# Altium PCB voltage regulator.PcbDoc
Units mm, origin at the board's own origin, x right, y up, seen from the top; angles counter-clockwise.
Board outline 26 x 9 mm, 2 copper layers (Top Layer, Bottom Layer); 5 components, 3 nets, 17 pads, 5 vias.
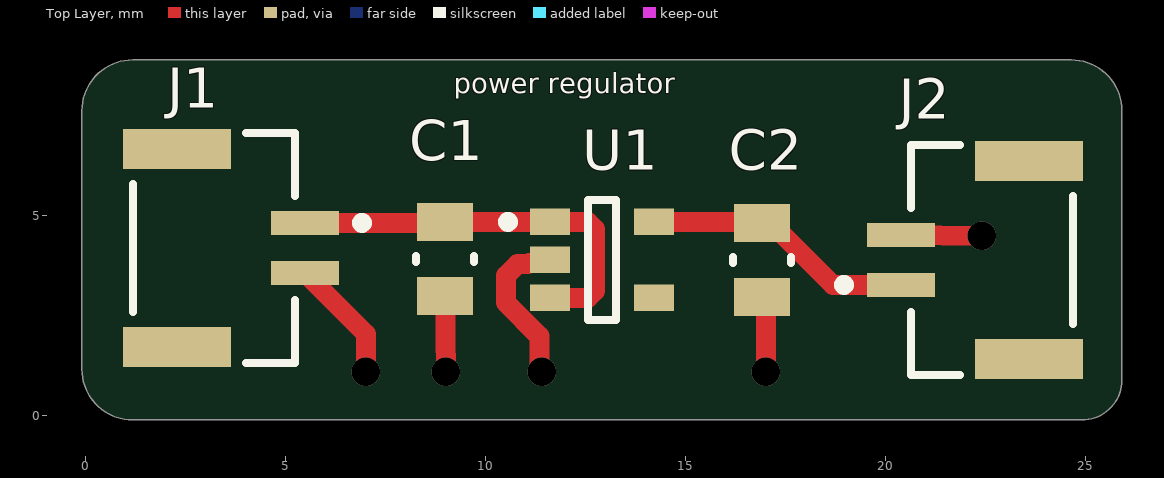
[diagram p0: Top Layer view]
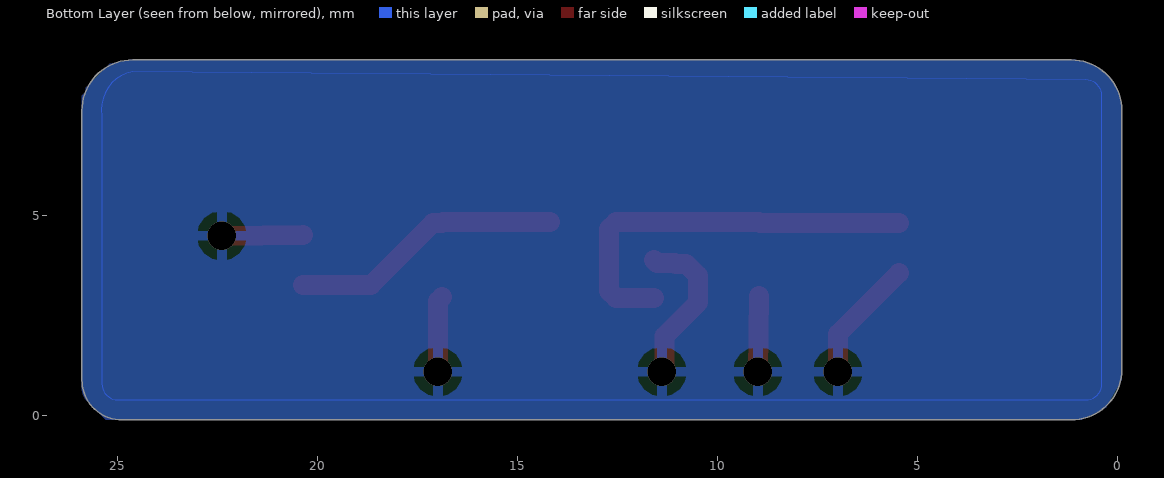
[diagram p1: Bottom Layer view, seen from below]
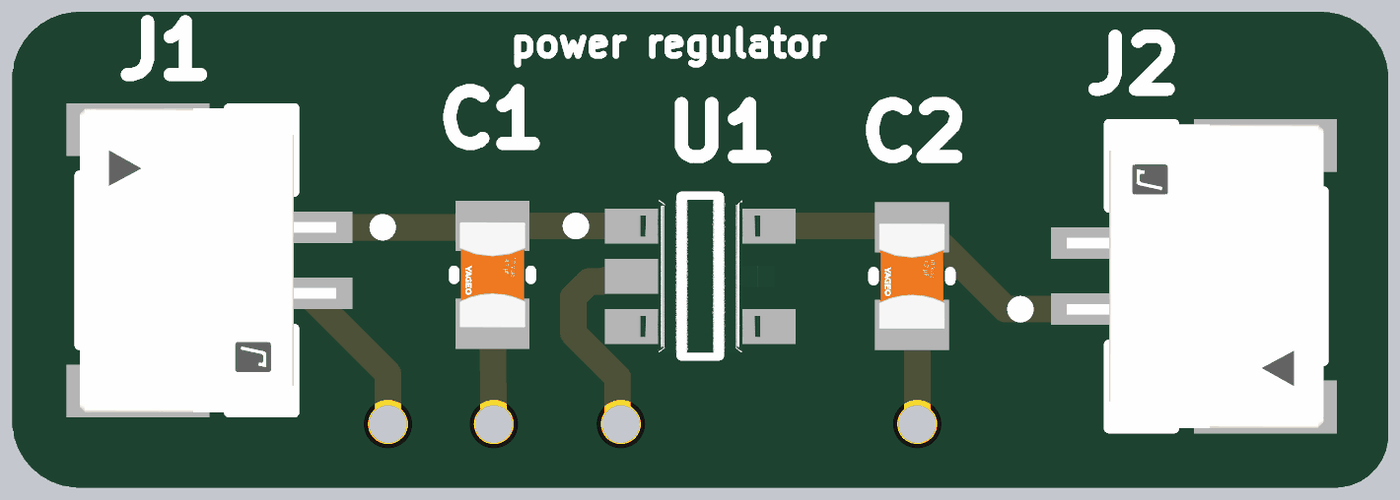
[diagram p2: 3D render of the assembled board from above, using the file's embedded part models]

## Layer stack, top to bottom
Top Solder: solder mask 0.0102, Solder Resist, Dk 3.5
Top Layer: signal copper 0.0356
Dielectric 1: dielectric 0.32, FR-4, Dk 4.8
Bottom Layer: signal copper 0.0356
Bottom Solder: solder mask 0.0102, Solder Resist, Dk 3.5

## Board outline
-0.1,1.17 -0.1,7.63 cw(c1.17,7.63) 1.17,8.9 24.63,8.9 cw(c24.63,7.63) 25.9,7.63 25.9,0.9 cw(c24.9,0.9) 24.9,-0.1 1.17,-0.1 cw(c1.17,1.17)

## Design rules (kind name [scope] priority, off if disabled: settings)
Clearance [All] p1: gap=0.025 ignorepadtopadclearanceinfootprint=FALSE
PolygonConnect [All] p1: connectstyle=Relief reliefconductorwidth=0.254 reliefentries=4 polygonreliefangle="90 Angle" airgapwidth=0.254
RoutingVias [All] p1: holewidth=0.711 width=1.27 viastyle="Through Hole" minholewidth=0.711 minwidth=1.27 maxholewidth=0.711 maxwidth=1.27
SolderMaskExpansion [All] p1: expansion=0.102 istentingtop=FALSE
UnpouredPolygon [All] p1: allowunpoured=TRUE allowshelved=TRUE
Width [All] p1: maxlimit=0.5 minlimit=0.254 preferedwidth=0.3
29 further rules are at their usual default settings.

## Components (designator, comment, footprint, x,y, rotation, side; value= is the part's Value field where it differs from the comment)
C1 "1uf" FP-CC0805-0_85-MFG 8.975,3.925 r270 top value="1 uF"
C2 "1uf" FP-CC0805-0_85-MFG 16.9,3.9 r270 top value="1 uF"
J1 "SM02B-GHS-TB(LF)(SN)" FP-SM02B-GHS-TB_LF_SN-MFG 3.2,4.2 r270 top
J2 "SM02B-GHS-TB(LF)(SN)" FP-SM02B-GHS-TB_LF_SN-MFG 22.65,3.9 r90 top
U1 "MIC5317-3.3YM5-TR" FP-SOT23-5LD-PL-1-MFG 12.9,3.9 r0 top (schematic designator U?)

## Footprints (in the part's own frame and the unit in brackets; to place one, negate y for a bottom-side part, rotate by r counter-clockwise, add the part's x,y. Pads: shape width x height; smd on the part's side, far side on the other; paste and mask are expansions set on the pad)
FP-CC0805-0_85-MFG [mm]
  rect 0.95x1.4 smd paste+0 mask+0: 1(-0.925,0) 2(0.925,0)
  silkscreen extent -0.08,-0.72 0.08,0.72, body extent -1.6,-1.05 1.6,1.05, height 0.25
FP-SM02B-GHS-TB_LF_SN-MFG [mm]
  rect 0.6x1.7 smd paste+0 mask+0: 1(-0.625,2.275) 2(0.625,2.275)
  rect 1x2.7 smd paste+0 mask+0: 3(-2.475,-0.925) 4(2.475,-0.925)
  silkscreen extent -2.88,-2.02 2.88,3.83, body extent -3.08,-2.37 3.08,3.22, height 0.25
FP-SOT23-5LD-PL-1-MFG [mm]
  rect 1x0.66 smd paste+0 mask+0: 1(-1.3,0.95) 2(-1.3,0) 3(-1.3,-0.95) 4(1.3,-0.95) 5(1.3,0.95)
  silkscreen extent -2.47,-1.5 0.35,1.5, body extent -1.4,-1.45 1.4,1.45, height 1.45

## Part data
C1 C2: library part CMP-03422-000816-1, "CAP CER 1UF 6.3V X5R 0805", Capacitance="1 uF", Manufacturer=Yageo, Manufacturer Part Number=CC0805KKX5R5BB105, Package=CC0805-0.85, Temperature="-30°C to +85°C", Temperature Characteristic=X5R, Temperature Range High=+85°C, Temperature Range Low=-30°C, Tolerance=0.1, Voltage Rating="6.3 V", Automotive=No, Category=Cap, ComponentLink2Description=Datasheet, ComponentLink2URL=http://www.yageo.com/documents/recent/UPY-GPHC_Y5V_6.3V-to-50V_8.pdf, Device Class L1="Passive Components", Device Class L2=Capacitors, Device Class L3="Ceramic Capacitors", Digikey Description="CAP CER 1UF 6.3V X5R 0805", Footprint Url=http://www.yageo.com/exep/pages/download/literatures/UPY-C_GEN_24.pdf, Height=0.95mm, Ipc Land Pattern Name=CAPC200125X85, Lead Free=Yes, Material=Ceramic, Octopart=https://octopart.com/cc0805kkx5r5bb105-yageo-71334571, RoHS=TRUE
J1 J2: library part CMP-2000-07076-2, "CONN HEADER SMD R/A 2POS 1.25MM", Color=Natural, Current Rating=1A, Package Quantity=2500, Voltage Rating=50V, Connector Type="Outer Shroud Contact", Contact Material=Bronze, Contact Plating=Tin, Contact Type="Male Pin", Fastening Type=Latch, Housing Color=Natural, Housing Material=Nylon, Lead Free="Lead Free", Mount="Surface Mount", Number Of Contacts=2, Number of Positions=2, Number Of Rows=1, Orientation="Right Angle", Packaging="Tape and Reel", Pitch=0.049inch, Series=GH, Termination=Solder
U1: library part CMP-06324-000116-1, "IC REG LINEAR 3.3V 150MA SOT23-5", Case/Package=SOT-23-5, Dropout Voltage=155mV, Max Input Voltage=6V, Max Operating Temperature=125°C, Min Current Limit=200mA, Min Input Voltage=2.5V, Min Operating Temperature=-40°C, Output Current=150mA, Output Voltage=3.3V, Package Quantity=3000, Power Supply Rejection Ratio (PSRR)=70dB, Mount="Surface Mount", Number of Outputs=1, Number of Regulators=1, Packaging="Tape and Reel", RoHS Compliant=No, Series=-

## Via types
v1: diameter 0.711, hole 0.711, Top Layer to Bottom Layer, 5 vias

## Nets (pads, with @x,y where several pads share a name; then routed paths per layer and width w, separated by ;. In a path a pad name is that pad's centre, name@x,y a point inside that pad or via, vN(x,y) a via of type N, cw(c..) or ccw(c..) an arc to the next point about the centre after c; other vN are vias at no path point)
+3.3V: C2.1 J2.1 U1.5 | length 6.8
  Top Layer w0.5: U1.5 16.875,4.85 C2.1 17.125,4.825 18.675,3.275 J2.1
+5V: C1.1 J1.1 U1.1 U1.3 | length 10.1
  Top Layer w0.5: J1.1 8.95,4.825 C1.1 12.55,4.85 12.726,4.674 12.726,3.126 12.55,2.95 U1.3
GND: C1.2 C2.2 J1.2 J2.2 U1.2 | length 13
  Top Layer w0.5: J1.2 7,2.05 v1(7,1.1) ; C1.2 v1(9,1.1) ; v1(11.4,1.1) 11.336,1.164 11.336,1.995 10.5,2.831 10.5,3.507 10.793,3.8 11.057,3.8 11.077,3.82 11.52,3.82 U1.2 ; C2.2 17,2.875 v1(17,1.1) ; J2.2 v1(22.4,4.5)
pads on no net: J1.3 J1.4 J2.3 J2.4 U1.4

## Polygon pours and split planes (outlines as drawn)
GND on Bottom Layer "GND_L02_P003" (solid, pour order 3): -0.1,7.63 cw(c1.17,7.63) 1.17,8.9 24.7,8.9 25.2,8.8 25.8,8.2 25.8,8.1 25.9,8 25.9,0.7 cw(c25.417,0.7) 25.759,0.359 25.3,-0.1 0.9,-0.1 0.3,0.2 -0.1,0.9
GND on Bottom Layer "NONET_L02_P001" (solid, shelved, pour order 1): 0.4,8 cw(c0.8,8) 0.8,8.4 24.63,8.6 cw(c24.465,7.665) 25.4,7.5 25.4,0.8 cw(c25,0.8) 25,0.4 0.8,0.4 cw(c0.8,0.8) 0.4,0.8

## Silkscreen, mask and mechanical layers (free items; w line width, h text height)
Top Overlay:
  text "power regulator" at 9.2,8.067 h0.5
Mechanical 1:
  lines w0.254: -0.1,1.17 ccw(c1.17,1.17) 1.17,-0.1 2.9,-0.1 24.9,-0.1 ccw(c24.9,0.9) 25.9,0.9 25.9,7.63 ccw(c24.63,7.63) 24.63,8.9 0.583,8.9 ccw(c0.583,8.217) -0.1,8.217 -0.1,1.17